# Altium PCB PCB1.pcbdoc (part 2 of 4)
Units mil, origin at the board's own origin, x right, y up, seen from the top; angles counter-clockwise.
Board outline 3067 x 4292.31 mil, 4 copper layers (Top Layer, Inner1, Inner2, Bottom Layer); 120 components, 131 nets, 693 pads, 342 vias.
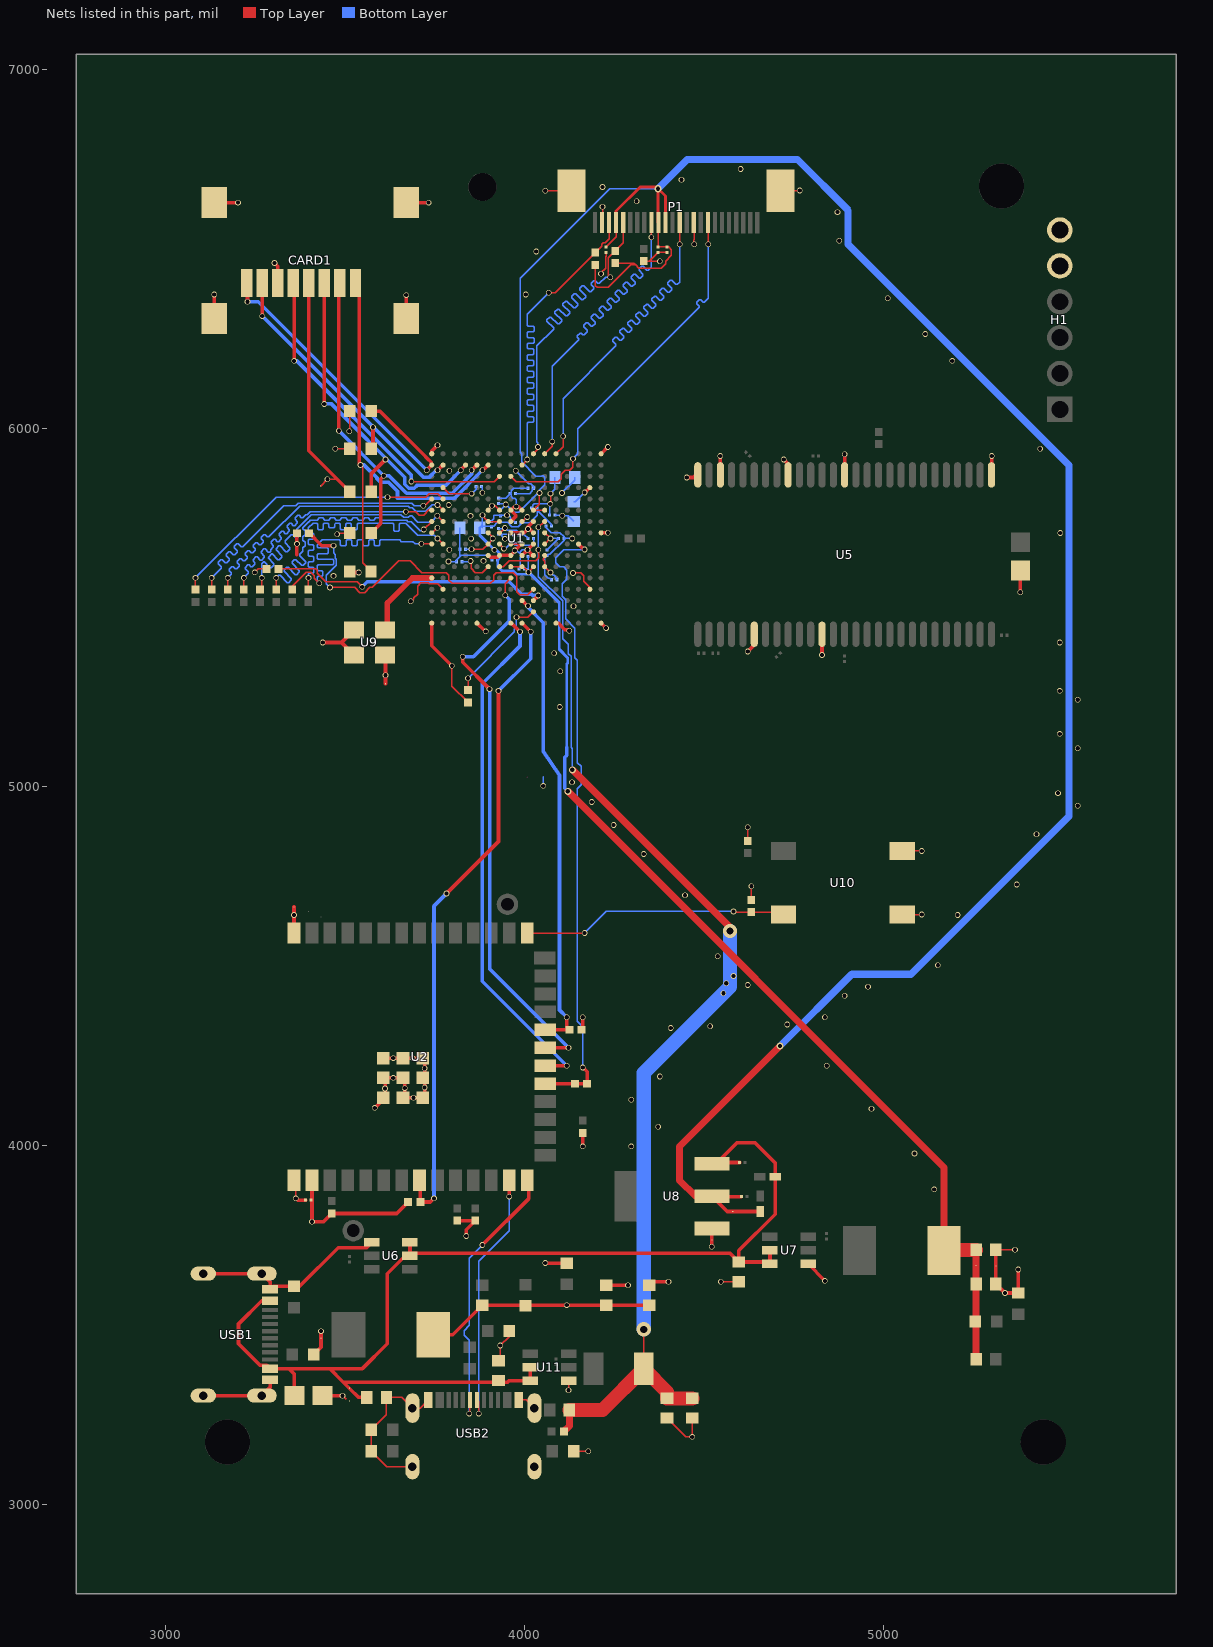
[diagram p4: the nets of this part, all layers, seen from the top]

## Via types
v1: diameter 15.75, hole 11.81, Top Layer to Bottom Layer, 336 vias
v2: diameter 19.68, hole 11.81, Top Layer to Bottom Layer, 4 vias
v3: diameter 39.37, hole 19.68, Top Layer to Bottom Layer, 2 vias

## Nets (pads, with @x,y where several pads share a name; then routed paths per layer and width w, separated by ;. In a path a pad name is that pad's centre, name@x,y a point inside that pad or via, vN(x,y) a via of type N, cw(c..) or ccw(c..) an arc to the next point about the centre after c; other vN are vias at no path point) (continued)
$2N5507: R23.2 U1.P10 | length 789
  Top Layer w3.94: R23.2@3314.36,5607.31 3417.32,5607.31 3421.49,5603.14 3421.49,5595.76 3445.76,5571.49 3533.14,5571.49 v1(3547.32,5557.31)
  Top Layer w10: U1.P10@4024.55,5519.09 4037.32,5531.85 v1@4037.32,5532.31
  Bottom Layer w10: v1(3547.32,5557.31) 3561.41,5571.41 3957.04,5571.41 3991.36,5537.1 4019.2,5537.1 4023.15,5533.15 v1@4038.15,5533.15
  other v1: 4038.15,5533.15
$2N5509: R24.2 U1.N10 | length 939.3
  Top Layer w3.94: v1(3457.32,5555.66) 3526.59,5555.66 3540.76,5541.49 3553.87,5541.49 3568.04,5555.66 3575.66,5555.66 3624.64,5604.64 3624.64,5604.85 3649.67,5629.87 3680.89,5629.87 3713.65,5597.11 3781,5597.11 3789.05,5589.07 3789.05,5575.85 3797.86,5567.04 3873.3,5567.04 3873.58,5567.31 3892.07,5567.31 3892.35,5567.04 3904.8,5567.04 3913.61,5575.85 3913.61,5589.96 3920.77,5597.11 3967.79,5597.11 3978.03,5586.88 3978.03,5544.36 3986.84,5535.55 4009.52,5535.55 U1.N10@4024.55,5550.59
  Top Layer w10: R24.2@3399.36,5707.31 3434.36,5672.31 v1(3467.32,5672.31)
  Bottom Layer w3.94: v1(3457.32,5555.66) 3447.32,5565.66 3447.32,5590.25 3475.19,5618.13 3475.19,5634.83 3472.32,5637.7 3472.32,5647.31 3467.32,5652.31 v1(3467.32,5672.31)
$2N5511: R25.2 U1.R10 | length 312.4
  Top Layer w3.94: R25.2@3842.32,5269.35 v1(3842.32,5302.31) ; v1(3977.32,5472.31) 4009.28,5472.31 U1.R10@4024.55,5487.6
  Bottom Layer w3.94: v1(3842.32,5302.31) 3971.49,5431.49 3971.49,5438.87 3977.32,5444.7 v1(3977.32,5472.31)
+1V1: C25.2 C27.2 C28.2 C41.1 C42.1 C43.1 C44.1 C49.1 C53.1 C54.1 C61.1 L2.2 pad.55@4112.31,5082.31 pad.55@5258.93,3665.01 R15.2 U1.G6 U1.G7 U1.L8 U1.L9 U1.L10 | length 3477.5
  Top Layer w3.94: v1@3882.32,5757.31 3882.32,5755.81 U1.G6@3898.57,5739.56 U1.G7@3930.07,5739.56 ; U1.L8@3961.57,5613.57 U1.L9@3993.07,5613.57 3995.68,5613.57 v1(4011.11,5598.14) 4024.55,5611.58 U1.L10@4024.55,5613.57
  Top Layer w19.68: v2(4120.58,4987.31) 5169.79,3938.11 L2.2@5169.79,3707.09 ; C25.2@5258.93,3403.85 C28.2@5258.93,3613.85 pad.55@5258.93,3665.01 C27.2@5258.93,3708.85
  Top Layer w39.37: L2.2@5169.79,3707.09 5171.55,3708.85 C27.2@5258.93,3708.85
  Bottom Layer w3.94: C61.1@3877.38,5724.81 3882.64,5730.08 v1(3882.64,5756.99) ; C61.1@3879.88,5722.31 3883.95,5726.4 3913.43,5726.4 3924.15,5737.12 3952.51,5737.12 3964.6,5725.03 3982.08,5725.03 3993.46,5736.49 4013.87,5736.49 4034.99,5757.61 4034.99,5767.31 ; C53.1@3999.99,5607.31 4007.32,5607.31 4009.99,5604.64 C49.1@4009.99,5642.31 ; C43.1@4034.99,5777.31 4034.99,5767.31 ; C44.1@4074.99,5727.31 4074.99,5731.67 4039.35,5767.31 4034.99,5767.31
  Bottom Layer w7.87: C61.1@3874.88,5722.31 3874.88,5701.32 v1(3915.79,5660.41) 3920.82,5660.41 3924.52,5656.71 3924.52,5656.56 3928.69,5652.39 3928.69,5636.01 C54.1@3924.99,5632.31 3924.99,5614.64 3937.32,5602.31 3967.14,5602.31 3977.14,5592.31 4010.58,5592.31 v1@4011.11,5592.85 ; v1(4011.11,5598.14) 4011.49,5598.14 4096.53,5513.1 4096.53,5405 4096.84,5404.69 4096.84,5389.94 4096.53,5389.63 4096.53,5383.27 4120.11,5359.69 4120.11,5344.94 4117.31,5342.15 4117.31,5110.63
  Bottom Layer w10: 4117.31,5110.63 4117.31,5087.31 pad.55@4112.31,5082.31 4112.31,4995.58 v2(4120.58,4987.31)
+1V8: C29.1 C32.2 C34.1 C35.1 C36.1 C62.1 C63.1 P1.4 P1.10 P1.11 pad.55@4580.36,3815.86 R38.2 R39.2 U1.F10 U1.F11 U8.2 | length 6822
  Top Layer w3.94: v1(4041.58,5818.9) 4041.58,5809.35 4041.02,5808.78 4041.02,5796.33 4041.58,5795.76 4041.58,5788.08 U1.F10@4024.55,5771.06 U1.F11@4056.05,5771.06 ; R38.2@4197.31,6455.27 4197.31,6437.03 4197.17,6436.88 4197.17,6397.46 4202.31,6392.31 4233.1,6392.31 4296.06,6455.27 4309.3,6455.27 ; C34.1@4227.31,6504.99 4255.17,6532.85 P1.4@4255.17,6572.88 ; R39.2@4252.31,6460.27 4304.3,6460.27 4309.3,6455.27 ; P1.10@4373.28,6572.88 4373.28,6505.96 C36.1@4372.31,6504.99 C35.1@4397.31,6504.99 4401.67,6504.99 4409.6,6497.06 4409.6,6482.21 4393.14,6465.75 4393.14,6458.72 4380.61,6446.19 4318.39,6446.19 4309.3,6455.27
  Top Layer w7.87: P1.4@4255.17,6572.88 4255.17,6604.87 4322.61,6672.31 4367.31,6672.31 v2(4372.31,6667.31) ; P1.10@4373.28,6572.88 4372.31,6573.84 v2(4372.31,6667.31) ; P1.11@4392.96,6572.88 4392.96,6646.67 v2(4372.31,6667.31)
  Top Layer w10: C29.1@4604.64,3857.32 4523.21,3857.32 4564.67,3815.86 pad.55@4580.36,3815.86 C32.2@4657.31,3815.86
  Top Layer w19.68: U8.2@4522.07,3858.45 4476.18,3858.45 4432.31,3902.32 4432.31,3997.32 v2(4712.31,4277.31)
  Bottom Layer w3.94: C63.1@3927.32,5789.64 3944.86,5789.64 v1(3947.69,5786.81) ; C62.1@3932.32,5769.99 3932.32,5771.43 v1(3947.69,5786.81) ; v2(4372.31,6667.31) 4237.31,6667.31 3987.32,6417.31 3987.32,5932.31 3991.49,5928.14 3991.49,5905.76 4031.35,5865.9 4048.32,5865.9 4049.74,5867.31 4052.32,5867.31 4056.84,5862.79 4056.84,5842.06 4041.58,5826.81 v1(4041.58,5818.9) 4037.17,5818.9 3983.5,5765.23 3970.39,5765.23 3948.81,5786.81 v1(3947.69,5786.81)
  Bottom Layer w19.68: v2(4372.31,6667.31) 4453.41,6748.41 4761.22,6748.41 4902.31,6607.31 4902.31,6512.31 5517.31,5897.31 5517.31,4917.31 5077.31,4477.31 4912.31,4477.31 v2(4712.31,4277.31)
+2V5: C65.2 C67.2 C68.2 L3.2 R41.2 U1.G11 U1.L7 | length 3334.5
  Top Layer w3.94: U1.L7@3930.07,5613.57 3940.3,5613.57 3956.76,5630.04 4030.78,5630.04 4039.59,5638.85 4039.59,5651.3 4038.43,5652.47 v1(4038.43,5660.82) ; v1(4038.43,5723.81) 4054.18,5739.56 U1.G11@4056.05,5739.56 ; L3.2@4332.2,3377.32 v3(4332.2,3487.32)
  Top Layer w19.68: R41.2@4109.35,3202.32 4124.88,3217.84 C65.2@4124.88,3262.32 ; v2(4133.14,5047.31) 4572.31,4608.14 v3(4572.31,4597.31)
  Top Layer w39.37: C65.2@4124.88,3262.32 4217.2,3262.32 L3.2@4332.2,3377.32 4397.31,3312.2 C68.2@4397.31,3294.88 C67.2@4467.31,3294.88
  Bottom Layer w3.94: v1(4038.43,5723.81) v1(4038.43,5660.82) 4038.43,5586.2 4106.37,5518.26 4106.37,5413.26 4122.31,5397.31 4122.31,5371.4 4129.95,5363.76 4129.95,5109.68 4133.14,5106.49 v2(4133.14,5047.31)
  Bottom Layer w39.37: v3(4332.2,3487.32) 4332.2,4202.2 v1(4554.27,4424.27) 4572.31,4442.31 v3(4572.31,4597.31)
  other v1: 4562.31,4452.31 4582.31,4472.31
+3V3: C8.2 C17.2 C19.2 C22.2 C23.2 C37.1 C39.1 C40.1 C45.1 C46.1 C47.1 C48.1 C50.1 C51.1 C52.1 C55.1 C56.1 C57.1 C58.1 C59.1 CARD1.4 H1.5 L1.2 pad.55@3431.11,5838.15 R3.1 R4.1 R5.2 R7.2 R11.2 R16.2 R17.2 R18.2 R19.2 R20.2 R21.2 R22.2 R23.1 U1.F6 U1.F7 U1.G9 U1.H6 U1.H7 U1.H11 U1.J6 U1.J7 U1.J11 U1.K11 U1.L6 U1.L11 U2.2 U9.1 U9.4 | length 3220.1
  Top Layer w3.94: v1(3247.39,5597.74) 3256.97,5607.31 R23.1@3280.28,5607.31 ; pad.55@3431.11,5838.15 v1(3450.28,5857.31) 3477.5,5857.31 3477.58,5857.39 ; v1(3472.32,5942.31) R18.2@3512.66,5942.31 ; v1(3477.32,5703.97) 3480.66,5707.31 R17.2@3512.66,5707.31 ; v1@3512.66,5992.31 R19.2@3512.66,6047.31 ; v1(3849.46,5629.32) 3850.62,5628.16 3850.62,5608.76 3862.07,5597.31 3882.32,5597.31 U1.L6@3898.57,5613.57 ; v1@3852.32,5662.31 3860.06,5662.31 3860.85,5661.53 3883.54,5661.53 U1.J6@3898.57,5676.56 3911.49,5689.48 v1(3911.49,5692.29) 3911.49,5695.15 U1.H6@3898.57,5708.06 ; U1.F6@3898.57,5771.06 3909.13,5781.61 v1(3909.13,5783.56) 3917.57,5783.56 U1.F7@3930.07,5771.06 ; U1.J7@3930.07,5676.56 3942.32,5664.32 v1@3942.32,5662.31 ; U1.H7@3930.07,5708.06 3931.94,5708.06 v1(3945.17,5721.29) ; U1.G9@3993.07,5739.56 4005.82,5752.31 v1(4007.32,5752.31) ; U1.K11@4056.05,5645.07 4056.05,5640.07 4052.32,5636.34 4052.32,5632.31 4056.05,5628.57 U1.L11@4056.05,5613.57 v1(4072.32,5597.31) ; U1.J11@4056.05,5676.56 4071.8,5692.31 v1(4072.32,5692.31) 4056.57,5708.06 U1.H11@4056.05,5708.06
  Top Layer w10: CARD1.4@3398.38,6404.32 3398.38,5936.59 3477.58,5857.39 R20.2@3512.66,5822.31 ; U2.2@3412.12,3902.82 3407.32,3898.02 v1(3407.32,3787.32) 3439.36,3787.32 R7.2@3462.32,3810.28 3643.24,3810.28 R5.2@3675.28,3842.32 ; v1(3437.32,5402.31) 3489.55,5402.31 ; R16.2@3512.5,5600.29 3515.47,5597.31 v1(3537.32,5597.31) ; U9.1@3524.01,5367.86 3489.55,5402.31 ; U9.4@3524.01,5436.77 3489.55,5402.31 ; L1.2@3745.43,3472.32 3799.88,3472.32 C19.2@3882.32,3554.76 4000.22,3554.76 R11.2@4002.32,3552.66 4004.41,3554.76 v1(4117.88,3554.76) C23.2@4227.31,3554.76 C22.2@4347.31,3554.76 ; R21.2@3812.32,3790.28 R22.2@3862.32,3790.28 3837.32,3765.28 v1(3837.32,3747.32) ; R3.1@4159.35,4322.31 4162.31,4325.27 v1(4162.31,4357.31) ; v1(4162.31,3997.32) R4.1@4162.31,4035.28 ; v1(5382.31,5542.31) C8.2@5382.31,5602.94
  Bottom Layer w3.94: C51.1@3824.99,5627.31 3847.45,5627.31 v1(3849.46,5629.32) ; C56.1@3834.99,5662.31 3851.7,5662.31 v1(3852.01,5662.01) ; C37.1@3879.99,5837.31 3882.32,5834.99 v1(3882.32,5819.66) ; C45.1@3927.32,5719.99 3943.87,5719.99 v1(3945.17,5721.29) 3951.87,5714.6 3977.06,5714.6 3981.72,5709.94 3981.72,5705.59 C46.1@3984.99,5702.31 3999.64,5702.31 C47.1@4009.64,5692.31 ; v1(3942.32,5663.93) 3946.25,5663.93 C57.1@3959.64,5677.31 ; C50.1@3974.99,5817.31 4014.35,5817.31 4021.72,5824.69 4021.72,5829.04 C39.1@4024.99,5832.31 4024.99,5836.67 4017.06,5844.6 4012.13,5844.6 v1(3975.44,5881.29) ; C52.1@4062.32,5659.99 C55.1@4094.64,5692.31 v1(4072.32,5692.31) ; v1(4072.32,5597.31) 4080.03,5589.6 4082.06,5589.6 4089.99,5581.67 C48.1@4089.99,5577.31 ; C40.1@4084.99,5757.31 4103.16,5757.31 v1(4105.12,5755.36) 4121.71,5755.36 C59.1@4137.31,5739.76 ; v1(4104.26,5819.21) 4139.88,5854.82 C58.1@4139.88,5862.31
  other v1: 3467.32,5587.87 3511.34,5991
+5V: C20.2 C26.2 C30.1 C31.2 C33.2 C66.2 pad.55@3511.57,3323.06 U6.2 U6.3 U7.2 U7.3 U8.3 U11.2 U11.3 USB1.A4B9 USB1.B4A9 | length 3397.5
  Top Layer w10: USB1.A4B9@3290.32,3566.8 3266.8,3566.8 3202.32,3502.32 3202.32,3447.35 3263.14,3386.53 3281.62,3386.53 USB1.B4A9@3290.32,3377.82 3342.68,3377.82 ; C33.2@3357.95,3302.32 3357.95,3362.56 3342.68,3377.82 ; C20.2@3559.76,3297.32 3537.32,3297.32 pad.55@3511.57,3323.06 3494.76,3339.88 ; U6.3@3680.47,3729.72 U6.2@3680.47,3692.32 ; U11.2@4016.25,3381.21 U11.3@4016.25,3343.81 3956.25,3343.81 3952.32,3339.88 3494.76,3339.88 ; U8.3@4522.07,3949 4534,3949 U8.3@4537.31,3952.32 ; C30.1@4599.64,3952.32 U8.3@4537.31,3952.32 ; U7.2@4684.16,3707.32 U7.3@4684.16,3669.91 4679.2,3674.88 C26.2@4597.31,3674.88 ; 3342.68,3377.82 3456.8,3377.82 ; 3456.8,3377.82 3547.82,3377.82 3617.32,3447.32 3617.32,3642.32 3667.32,3692.32 U6.2@3680.47,3692.32 ; 3456.8,3377.82 3494.76,3339.88 ; U6.2@3680.47,3692.32 3686.98,3698.83 4573.36,3698.83 C26.2@4597.31,3674.88 ; U8.3@4537.31,3952.32 4592.31,4007.32 4642.31,4007.32 4698.77,3950.86 C31.2@4698.77,3912.32 4698.77,3808.32 4597.31,3706.86 C26.2@4597.31,3674.88
CCLK: R6.1 R6.2 U1.J14 U2.19 | length 1754.5
  Top Layer w10: U2.19@4062.51,4172.31 R6.1@4140.27,4172.31 R6.2@4174.35,4172.31 4174.35,4205.27 v1(4162.31,4217.31) ; U1.J14@4150.55,5676.56 4165.62,5661.49 v1(4167.31,5661.49)
  Bottom Layer w3.94: v1(4162.31,4217.31) 4162.31,4330.65 4146.49,4346.47 4146.49,4994.99 4157.31,5005.81 4157.31,5057.31 4147.31,5067.31 4146.49,5067.31 4146.49,5353.14 4140.5,5359.13 4140.5,5441.87 4114.58,5467.8 4114.58,5521.53 4105.58,5530.53 4105.58,5565.58 4118.14,5578.14 4118.14,5603.87 4108.87,5613.14 4097.62,5613.14 4086.42,5624.34 4086.42,5638.81 4109.11,5661.49 v1(4167.31,5661.49)
CRYSTAL: U1.M1 U9.3 | length 231
  Top Layer w15.75: U9.3@3610.62,5436.77 3617.32,5443.45 3617.32,5512.31 3687.07,5582.07 U1.M1@3741.09,5582.07
D0: R26.1 U1.E2 | length 827.3
  Top Layer w3.94: R26.1@3082.32,5549.35 v1(3082.32,5582.31) ; v1@3617.32,5807.31 3724.59,5807.31 3734.87,5817.59 3757.56,5817.59 U1.E2@3772.59,5802.56
  Bottom Layer w3.94: v1(3082.32,5582.31) 3307.32,5807.31 v1(3617.69,5807.31)
D1: R27.1 U1.E1 | length 830.3
  Top Layer w3.94: R27.1@3127.32,5549.35 v1(3127.32,5582.31) ; v1(3717.32,5783.46) 3722,5783.46 U1.E1@3741.09,5802.56
  Bottom Layer w3.94: v1(3127.32,5582.31) 3154.28,5609.28 3154.28,5613.22 3145.72,5621.78 3145.72,5625.72 3152.92,5632.92 3156.86,5632.92 3165.42,5624.36 3169.36,5624.36 3176.56,5631.56 3176.56,5635.49 3167.99,5644.06 3167.99,5647.99 3175.19,5655.19 3179.13,5655.19 3187.69,5646.63 3191.63,5646.63 3198.83,5653.83 3198.83,5657.76 3190.26,5666.33 3190.26,5670.26 3197.46,5677.46 3201.4,5677.46 3209.96,5668.9 3213.9,5668.9 3328.46,5783.46 3362.32,5783.46 3369.33,5790.46 3685.54,5790.46 3692.55,5783.46 v1(3717.32,5783.46)
D2: R28.1 U1.F2 | length 844.7
  Top Layer w3.94: R28.1@3172.32,5549.35 v1(3172.32,5582.31) ; v1(3757.19,5785.61) 3758.04,5785.61 U1.F2@3772.59,5771.06
  Bottom Layer w3.94: v1(3172.32,5582.31) 3182.32,5592.31 3182.32,5596.25 3176.25,5602.31 3176.25,5606.25 3183.45,5613.45 3187.39,5613.45 3193.45,5607.39 3197.39,5607.39 3204.59,5614.59 3204.59,5618.52 3198.52,5624.59 3198.52,5628.52 3205.72,5635.72 3209.66,5635.72 3215.72,5629.66 3219.66,5629.66 3226.86,5636.86 3226.86,5640.79 3220.79,5646.86 3220.79,5650.79 3227.99,5657.99 3231.93,5657.99 3237.99,5651.93 3241.93,5651.93 3249.13,5659.13 3249.13,5663.07 3243.07,5669.13 3243.07,5673.07 3250.26,5680.26 3254.2,5680.26 3260.26,5674.2 3264.2,5674.2 3271.4,5681.4 3271.4,5685.34 3265.34,5691.4 3265.34,5695.34 3272.53,5702.53 3276.47,5702.53 3282.53,5696.47 3286.47,5696.47 3372.59,5782.59 3675.64,5782.59 3679.95,5778.28 3686.59,5778.28 3697.24,5767.63 3723.87,5767.63 3741.85,5785.61 v1(3757.19,5785.61)
D3: R29.1 U1.F1 | length 814.7
  Top Layer w3.94: R29.1@3217.32,5549.35 v1(3217.32,5582.31) ; v1(3669.08,5766.76) 3696.63,5766.76 3705.76,5757.63 3718.87,5757.63 3732.97,5771.72 3740.43,5771.72 U1.F1@3741.09,5771.06
  Bottom Layer w3.94: v1(3217.32,5582.31) 3229.89,5594.89 3229.89,5598.82 3221.32,5607.39 3221.32,5611.32 3228.52,5618.52 3232.46,5618.52 3237.16,5613.82 3241.09,5613.82 3248.29,5621.02 3248.29,5624.96 3243.59,5629.66 3243.59,5633.59 3250.79,5640.79 3254.73,5640.79 3263.29,5632.23 3267.23,5632.23 3274.43,5639.43 3274.43,5643.36 3265.86,5651.93 3265.86,5655.86 3273.06,5663.06 3277,5663.06 3285.56,5654.5 3289.5,5654.5 3291.57,5656.57 3291.57,5660.36 3299.92,5668.71 3299.92,5672.65 3293.25,5679.32 3293.25,5683.25 3300.45,5690.45 3304.39,5690.45 3311.05,5683.79 3314.99,5683.79 3322.19,5690.98 3322.19,5694.92 3315.52,5701.59 3315.52,5705.52 3322.72,5712.72 3326.66,5712.72 3333.33,5706.06 3337.26,5706.06 3344.46,5713.25 3344.46,5717.19 3337.79,5723.86 3337.79,5727.79 3344.99,5734.99 3348.93,5734.99 3355.6,5728.33 3359.53,5728.33 3366.73,5735.53 3366.73,5739.46 3360.07,5746.13 3360.07,5750.07 3367.26,5757.26 3371.2,5757.26 3377.87,5750.6 3381.8,5750.6 3390.02,5758.81 3393.81,5758.81 3401.76,5766.76 v1(3669.08,5766.76)
D4: R30.1 U1.G2 | length 836.9
  Top Layer w3.94: R30.1@3262.32,5549.35 3267.32,5554.35 v1(3267.32,5582.31) ; v1(3756.6,5755.44) 3756.71,5755.44 U1.G2@3772.59,5739.56
  Bottom Layer w3.94: v1(3267.32,5582.31) 3267.32,5621.18 3273.07,5626.94 3273.78,5626.94 3290,5610.72 3293.94,5610.72 3301.13,5617.92 3301.13,5621.86 3284.92,5638.07 3284.92,5638.78 3295.34,5649.21 3296.05,5649.21 3312.27,5632.99 3316.21,5632.99 3323.4,5640.19 3323.4,5644.13 3307.19,5660.34 3307.19,5664.28 3314.39,5671.48 3318.32,5671.48 3334.54,5655.26 3338.48,5655.26 3345.68,5662.46 3345.68,5666.4 3332.32,5679.76 3332.32,5686.18 3349.07,5702.94 3353.01,5702.94 3361.6,5694.34 3365.54,5694.34 3372.74,5701.54 3372.74,5705.48 3364.15,5714.07 3364.15,5718.01 3405.03,5758.89 3654.57,5758.89 3662.53,5750.94 3675.64,5750.94 3680.64,5755.94 3684.91,5755.94 3702.7,5738.14 3739.3,5738.14 v1(3756.6,5755.44)
D5: R31.1 U1.G1 | length 826
  Top Layer w3.94: R31.1@3307.32,5549.35 v1(3307.32,5582.31) ; v1(3718.64,5717.31) 3718.86,5717.31 U1.G1@3741.09,5739.56
  Bottom Layer w3.94: v1(3307.32,5582.31) 3314.35,5589.35 3318.29,5589.35 3338.33,5569.31 3342.27,5569.31 3349.47,5576.51 3349.47,5580.45 3329.43,5600.49 3329.43,5604.43 3336.62,5611.62 3340.56,5611.62 3360.6,5591.58 3364.54,5591.58 3371.74,5598.78 3371.74,5602.72 3351.7,5622.76 3351.7,5626.7 3358.14,5633.14 3362.07,5633.14 3378.31,5616.91 3382.24,5616.91 3389.44,5624.11 3389.44,5628.04 3373.21,5644.27 3373.21,5648.21 3381.1,5656.1 3381.1,5666.24 3383.89,5669.03 3385.5,5669.03 3388.29,5671.81 3388.29,5681.99 3385.5,5684.77 3383.89,5684.77 3381.1,5687.56 3381.1,5697.74 3383.89,5700.52 3385.5,5700.52 3388.29,5703.31 3388.29,5713.49 3385.5,5716.27 3383.89,5716.27 3381.1,5719.05 3381.1,5721.95 3398.67,5739.51 3399.51,5739.51 3403.06,5743.06 3422.17,5743.06 3424.96,5745.85 3424.96,5747.08 3427.74,5749.86 3437.92,5749.86 3440.71,5747.08 3440.71,5745.85 3443.49,5743.06 3453.67,5743.06 3456.45,5745.85 3456.45,5747.08 3459.24,5749.86 3469.42,5749.86 3472.2,5747.08 3472.2,5745.85 3474.99,5743.06 3485.17,5743.06 3487.95,5745.85 3487.95,5747.08 3490.73,5749.86 3500.91,5749.86 3503.7,5747.08 3503.7,5745.85 3506.48,5743.06 3516.66,5743.06 3519.45,5745.85 3519.45,5747.08 3522.23,5749.86 3532.41,5749.86 3535.19,5747.08 3535.19,5745.85 3537.98,5743.06 3548.16,5743.06 3550.94,5745.85 3550.94,5747.08 3553.73,5749.86 3563.91,5749.86 3566.69,5747.08 3566.69,5745.85 3569.47,5743.06 3579.65,5743.06 3582.44,5745.85 3582.44,5747.08 3585.22,5749.86 3595.4,5749.86 3598.19,5747.08 3598.19,5745.85 3600.97,5743.06 3671.23,5743.06 3674.78,5739.51 3683.77,5739.51 3709.52,5713.77 3715.09,5713.77 v1(3718.64,5717.31)
D6: R32.1 U1.J1 | length 823.8
  Top Layer w3.94: R32.1@3352.32,5549.35 3352.32,5559.7 3390.76,5598.14 3403.87,5598.14 3413.14,5588.87 3413.14,5581.49 v1(3427.32,5567.31) ; v1(3712.32,5677.31) 3740.34,5677.31 U1.J1@3741.09,5676.56
  Bottom Layer w3.94: v1(3427.32,5567.31) 3421.49,5573.14 3421.49,5584.32 3424.27,5587.11 3434.68,5587.11 3437.46,5589.89 3437.46,5600.07 3434.68,5602.86 3424.27,5602.86 3421.49,5605.64 3421.49,5615.82 3424.27,5618.6 3464.53,5618.6 3467.32,5621.39 3467.32,5631.57 3464.53,5634.35 3424.27,5634.35 3421.49,5637.14 3421.49,5647.32 3424.27,5650.1 3449.52,5650.1 3452.3,5652.88 3452.3,5663.06 3449.52,5665.85 3424.27,5665.85 3421.49,5668.63 3421.49,5673.87 3435.76,5688.14 3483.69,5688.14 3486.47,5685.36 3486.47,5675.1 3489.26,5672.31 3499.44,5672.31 3502.22,5675.1 3502.22,5685.36 3505.01,5688.14 3515.19,5688.14 3517.97,5685.36 3517.97,5675.1 3520.75,5672.31 3530.93,5672.31 3533.72,5675.1 3533.72,5685.36 3536.5,5688.14 3546.68,5688.14 3549.47,5685.36 3549.47,5675.1 3552.25,5672.31 3562.43,5672.31 3565.21,5675.1 3565.21,5685.36 3568,5688.14 3578.18,5688.14 3580.96,5685.36 3580.96,5675.1 3583.75,5672.31 3593.93,5672.31 3596.71,5675.1 3596.71,5685.36 3599.49,5688.14 3651.49,5688.14 3656.49,5683.14 3688.87,5683.14 3694.7,5677.31 v1(3712.32,5677.31)
D7: R34.1 U1.J2 | length 826.3
  Top Layer w3.94: R34.1@3397.32,5549.35 v1(3397.32,5582.31) ; v1(3757.32,5692.31) 3757.32,5691.85 U1.J2@3772.59,5676.56
  Bottom Layer w3.94: v1(3397.32,5582.31) 3397.32,5593.11 3400.1,5595.9 3409.68,5595.9 3412.46,5598.68 3412.46,5608.86 3409.68,5611.64 3400.1,5611.64 3397.32,5614.43 3397.32,5624.61 3400.1,5627.39 3409.68,5627.39 3412.46,5630.18 3412.46,5640.36 3409.68,5643.14 3400.1,5643.14 3397.32,5645.92 3397.32,5656.1 3400.1,5658.89 3409.68,5658.89 3412.46,5661.67 3412.46,5671.85 3409.68,5674.64 3400.1,5674.64 3397.32,5677.42 3397.32,5687.6 3400.1,5690.38 3409.68,5690.38 3412.46,5693.17 3412.46,5703.35 3409.68,5706.13 3400.1,5706.13 3397.32,5708.92 3397.32,5722.31 3410.19,5735.19 3419.98,5735.19 3422.76,5732.41 3422.76,5719.09 3425.54,5716.3 3435.72,5716.3 3438.51,5719.09 3438.51,5732.41 3441.29,5735.19 3451.47,5735.19 3454.26,5732.41 3454.26,5724.65 3457.04,5721.87 3467.22,5721.87 3470,5724.65 3470,5732.41 3472.79,5735.19 3482.97,5735.19 3485.75,5732.41 3485.75,5719.09 3488.54,5716.3 3498.72,5716.3 3501.5,5719.09 3501.5,5732.41 3504.28,5735.19 3514.47,5735.19 3517.25,5732.41 3517.25,5719.09 3520.03,5716.3 3530.21,5716.3 3533,5719.09 3533,5732.41 3535.78,5735.19 3632.38,5735.19 3635.16,5732.41 3635.16,5715.1 3637.95,5712.31 3648.13,5712.31 3650.91,5715.1 3650.91,5732.41 3653.69,5735.19 3667.97,5735.19 3701.67,5701.49 3748.14,5701.49 v1(3757.32,5692.31)
DIN: U1.T8 U2.20 | length 1441.2
  Top Layer w10: U1.T8@3961.57,5456.1 3963.53,5456.1 v1(3987.32,5432.31) ; U2.20@4062.51,4222.31 v1(4117.31,4222.31)
  Bottom Layer w10: v1(3987.32,5432.31) 3987.32,5392.31 3882.32,5287.31 3882.32,4457.31 v1(4117.31,4222.31)
DN: U2.13 USB2.A7 | length 727.9
  Top Layer w3.94: USB2.A7@3867.16,3290.32 3872.32,3285.16 v1(3872.32,3252.32)
  Top Layer w10: v1(3957.32,3857.32) 3957.32,3898.02 U2.13@3962.12,3902.82
  Bottom Layer w3.94: v1(3872.32,3252.32) 3872.32,3677.32 3957.32,3762.32 v1(3957.32,3857.32)
DONE: pad.55@4077.32,5057.31 R3.2 U1.P9 U2.22 | length 1310.8
  Top Layer w10: U1.P9@3993.07,5519.09 4007.64,5504.51 v1(4009.51,5504.51) ; U2.22@4062.51,4322.31 R3.2@4125.27,4322.31 4117.31,4330.27 v1(4117.31,4357.31)
  Bottom Layer w10: v1(4009.51,5504.51) 4009.51,5500.12 4052.32,5457.31 4052.32,5097.31 4097.31,5032.31 4097.31,4377.31 v1(4117.31,4357.31)
DOUT: U1.M8 U2.21 | length 1574.2
  Top Layer w3.94: v1(3945.82,5534.26) 3945.82,5566.33 U1.M8@3961.57,5582.07
  Top Layer w10: v1(3827.32,5362.31) 3827.32,5347.31 v1(3902.32,5272.31) ; U2.21@4062.51,4272.31 v1(4122.31,4272.31)
  Bottom Layer w10: v1(3827.32,5362.31) 3857.32,5362.31 3957.01,5462.01 3957.01,5523.07 v1(3945.82,5534.26) ; v1(3902.32,5272.31) 3902.32,4492.31 v1(4122.31,4272.31)
DP: U2.14 USB2.A6 | length 769.2
  Top Layer w3.94: v1@3847.47,3252.32 USB2.A6@3847.47,3290.32
  Top Layer w10: v1(3882.32,3722.32) 4012.12,3852.12 U2.14@4012.12,3902.82
  Bottom Layer w3.94: v1(3845.58,3252.32) 3845.58,3456.66 3831.49,3470.76 3831.49,3483.87 3845.58,3497.97 3845.58,3685.58 v1(3882.32,3722.32)
FSCL: P1.5 R39.1 U1.A10 | length 1063.4
  Top Layer w3.94: U1.A10@4024.55,5928.53 4037.32,5941.3 v1(4037.32,5947.31) ; v1(4239.02,6420.61) 4233.73,6425.9 4233.73,6474.7 4252.31,6493.29 R39.1@4252.31,6494.35 4274.85,6516.89 P1.5@4274.85,6572.88
  Bottom Layer w3.94: v1(4037.32,5947.31) 4037.32,5958.56 4034.14,5961.74 4034.14,6229.09 4080.96,6275.9 4080.96,6279.84 4062.37,6298.43 4062.37,6302.37 4069.57,6309.57 4073.5,6309.57 4092.09,6290.98 4096.03,6290.98 4103.23,6298.18 4103.23,6302.11 4084.64,6320.7 4084.64,6324.64 4091.84,6331.84 4095.77,6331.84 4114.36,6313.25 4118.3,6313.25 4125.5,6320.45 4125.5,6324.38 4106.91,6342.97 4106.91,6346.91 4114.11,6354.11 4118.04,6354.11 4136.63,6335.52 4140.57,6335.52 4147.77,6342.72 4147.77,6346.65 4131.15,6363.27 4131.15,6367.21 4138.35,6374.41 4142.28,6374.41 4158.9,6357.79 4162.84,6357.79 4170.04,6364.99 4170.04,6368.93 4153.42,6385.55 4153.42,6389.48 4160.62,6396.68 4164.56,6396.68 4181.18,6380.06 4185.11,6380.06 4193.21,6388.16 4193.21,6392.1 4185.73,6399.57 4185.73,6403.51 4192.93,6410.71 4196.87,6410.71 4204.35,6403.23 4208.28,6403.23 4225.67,6420.61 v1(4239.02,6420.61)
FSDA: P1.3 R38.1 U1.B9 | length 1063.6
  Top Layer w3.94: U1.B9@3993.07,5897.03 4007.32,5911.28 v1(4007.32,5912.31) ; v1(4067.32,6377.31) 4085.28,6377.31 R38.1@4197.31,6489.35 4215.03,6507.07 4215.03,6512.42 4219.69,6517.08 4225.04,6517.08 4235.48,6527.52 P1.3@4235.48,6572.88
  Bottom Layer w3.94: v1(4007.32,5912.31) 4007.32,6012.88 4010.1,6015.67 4022.56,6015.67 4025.35,6018.45 4025.35,6028.63 4022.56,6031.41 4010.1,6031.41 4007.32,6034.2 4007.32,6044.79 4010.1,6047.57 4022.56,6047.57 4025.35,6050.36 4025.35,6060.54 4022.56,6063.32 4010.1,6063.32 4007.32,6066.11 4007.32,6076.29 4010.1,6079.07 4022.56,6079.07 4025.35,6081.85 4025.35,6092.03 4022.56,6094.82 4010.1,6094.82 4007.32,6097.6 4007.32,6107.78 4010.1,6110.57 4022.56,6110.57 4025.35,6113.35 4025.35,6123.53 4022.56,6126.31 4010.1,6126.31 4007.32,6129.1 4007.32,6139.28 4010.1,6142.06 4022.56,6142.06 4025.35,6144.85 4025.35,6155.03 4022.56,6157.81 4010.1,6157.81 4007.32,6160.59 4007.32,6170.78 4010.1,6173.56 4022.56,6173.56 4025.35,6176.34 4025.35,6186.52 4022.56,6189.31 4010.1,6189.31 4007.32,6192.09 4007.32,6202.27 4010.1,6205.06 4022.56,6205.06 4025.35,6207.84 4025.35,6218.02 4022.56,6220.8 4010.1,6220.8 4007.32,6223.59 4007.32,6233.77 4010.1,6236.55 4024.53,6236.55 4027.32,6239.34 4027.32,6249.52 4024.53,6252.3 4010.1,6252.3 4007.32,6255.08 4007.32,6265.26 4010.1,6268.05 4024.53,6268.05 4027.32,6270.83 4027.32,6281.01 4024.53,6283.8 4010.1,6283.8 4007.32,6286.58 4007.32,6317.31 v1(4067.32,6377.31)
GND: C17.1 C20.1 C22.1 C23.1 C26.1 C27.1 C28.1 C33.1 C34.2 C35.2 C36.2 C37.2 C39.2 C40.2 C41.2 C42.2 C43.2 C44.2 C45.2 C46.2 C47.2 C48.2 C49.2 C50.2 C51.2 C52.2 C53.2 C54.2 C55.2 C56.2 C57.2 C58.2 C59.2 C61.2 C62.2 C63.2 C66.1 C67.1 C68.1 CARD1.6 CARD1.9 CARD1.10 CARD1.11 CARD1.12 H1.6 P1.2 P1.15 P1.25 P1.26 pad.55@3357.12,4665 pad.55@3432.32,3462.32 pad.55@3512.32,3287.32 pad.55@3612.32,5287.31 pad.55@4052.32,5027.32 pad.55@4522.07,3735.92 pad.55@5314.05,3663.47 R9.1 R10.1 R12.1 R14.1 R24.1 R25.1 R35.2 R36.2 R37.2 R40.1 R42.2 R43.2 R45.1 U1.A1 U1.A16 U1.D2 U1.D15 U1.F8 U1.F9 U1.G8 U1.G10 U1.H1 U1.H8 U1.H9 U1.H10 U1.H16 U1.J8 U1.J9 U1.J10 U1.K6 U1.K7 U1.K8 U1.K9 U1.K10 U1.N2 U1.N15 U1.T1 U1.T5 U1.T12 U1.T16 U2.1 U2.40 U2.41 U5.6 U5.12 U5.28 U5.41 U5.46 U5.52 U5.54 U6.4 U7.4 U8.1 U9.2 U10.2 U10.4 U11.4 USB1.1 USB1.2 USB1.3 USB1.4 USB1.A1B12 USB1.B1A12 USB2.1 USB2.2 USB2.3 USB2.4 USB2.A1B12 USB2.B1A12 | length 6775.4
  Top Layer w3.94: U2.1@3357.12,3902.82 3362.12,3897.82 v1(3362.12,3852.32) ; v1(3492.32,3302.32) 3502.32,3292.32 ; v1(3682.32,5517.31) 3685.22,5517.31 3691.49,5523.59 3691.49,5526.9 3701.49,5536.9 3701.49,5558.87 3710.76,5568.14 3731.49,5568.14 3733.76,5565.86 3757.32,5565.86 U1.N2@3772.59,5550.59 ; USB2.3@3687.24,3104.3 3615.66,3104.3 R42.2@3572.66,3147.32 R43.2@3572.66,3207.32 3614.88,3249.53 C20.1@3614.88,3297.32 3657.61,3297.32 USB2.1@3687.24,3267.68 3708.68,3267.68 USB2.A1B12@3731.32,3290.32 ; 3747.32,5712.31 3756.84,5721.84 v1(3756.84,5722.31) ; U1.D2@3772.59,5834.05 3789.32,5817.31 3797.58,5817.31 3797.86,5817.59 3841.81,5817.59 3842.09,5817.31 v1@3852.32,5817.31 ; v1(3797.32,5337.31) 3797.32,5280.27 R25.1@3842.32,5235.27 ; C66.1@3927.32,3399.88 3932.32,3404.88 v1(3932.32,3442.32) 3956.97,3466.97 R45.1@3956.97,3482.32 ; U1.J8@3961.57,5676.56 U1.J9@3990.82,5676.56 ; USB2.B1A12@3983.3,3290.32 4004.76,3290.32 USB2.2@4027.39,3267.68 ; v1(4057.32,6661.62) P1.26@4130.94,6661.62 ; v1(4071.8,5788.68) 4072.32,5789.19 v1(4072.32,5817.31) ; v1(4122.31,3317.32) 4122.55,3317.55 U11.4@4122.55,3343.81 ; v1(4134.8,5595.95) 4140.27,5595.95 4141.44,5597.11 4156.77,5597.11 4165.58,5588.3 4165.58,5572.97 4182.03,5556.52 U1.N15@4182.03,5550.59 ; R40.1@4136.98,3147.32 v1(4177.31,3147.32) ; v1(4213,6430.33) 4213,6433 4225.86,6445.86 4225.86,6477.97 4227.31,6479.42 C34.2@4227.31,6489.64 ; P1.2@4215.8,6572.88 4217.31,6574.39 v1(4217.31,6617.31) ; R35.2@4332.31,6465.27 4347.95,6465.27 ; v1(4377.31,6465.27) 4347.95,6465.27 ; C68.1@4397.31,3239.76 4449.76,3187.32 v1(4467.31,3187.32) C67.1@4467.31,3239.76 ; C35.2@4397.31,6489.64 C36.2@4372.31,6489.64 4347.95,6465.27 ; P1.15@4471.55,6572.82 4473,6571.38 4473,6525.62 4472.31,6524.93 v1@4472.31,6512.31 ; v1(4547.31,3619.76) C26.1@4597.31,3619.76 ; R36.2@4622.31,4849.35 v1(4622.31,4887.31) ; R37.2@4632.31,4684.35 v1(4632.31,4722.31) ; P1.25@4713.69,6661.88 4766.88,6661.88 v1(4767.31,6662.31) ; U10.4@5052.66,4643.73 v1(5107.31,4643.73) ; U10.2@5052.66,4820.9 v1(5107.31,4820.9) ; C27.1@5314.05,3708.85 v1(5367.31,3708.85)
  Top Layer w10: USB1.4@3104.3,3302.24 USB1.2@3267.68,3302.24 3290.32,3324.88 USB1.B1A12@3290.32,3346.34 ; USB1.3@3104.3,3642.39 USB1.1@3267.68,3642.39 3290.32,3619.76 USB1.A1B12@3290.32,3598.3 3298.99,3606.97 R9.1@3357.32,3606.97 3372.32,3606.97 3480.05,3714.72 3547.57,3714.72 3547.96,3715.11 3559.56,3715.11 U6.4@3574.16,3729.72 ; CARD1.10@3134.6,6305.9 v1(3134.59,6372.49) ; CARD1.9@3134.6,6628.73 v1(3200.93,6628.73) ; v1(3302.81,6460.52) 3311.76,6451.57 CARD1.6@3311.76,6404.32 ; pad.55@3357.12,4665 v1(3357.12,4642.46) 3357.12,4596.81 U2.40@3362.12,4591.81 ; v1(3362.12,3852.32) 3367.12,3847.32 C17.1@3389.64,3847.32 ; 3365.28,5647.31 v1(3365.28,5677.06) R24.1@3365.28,5707.31 ; R10.1@3411.97,3417.32 3432.32,3437.66 pad.55@3432.32,3462.32 v1(3432.32,3482.32) ; C33.1@3436.68,3302.32 v1(3492.32,3302.32) ; v1(3582.35,4104.54) 3610.94,4133.14 v1(3610.94,4158.84) 3610.94,4188.26 v1(3633.62,4188.26) 3666.06,4188.26 v1(3666.06,4159.83) 3666.06,4133.14 v1(3690.46,4133.14) 3721.18,4133.14 v1(3721.18,4161.55) v1(3721.18,4215.19) 3721.18,4243.38 v1(3687.76,4243.38) U2.41@3661.06,4243.38 v1(3633.62,4243.38) U2.41@3610.94,4243.38 ; U9.2@3610.62,5367.86 3612.32,5366.18 v1(3612.32,5311.15) pad.55@3612.32,5287.31 ; CARD1.11@3670.03,6305.9 v1(3670.03,6370.83) ; CARD1.12@3670.03,6628.73 v1(3732.32,6628.73) ; U1.T1@3741.09,5456.1 3741.09,5393.53 v1(3797.32,5337.31) ; U1.A1@3741.09,5928.53 3741.09,5936.1 v1(3757.32,5952.31) ; U1.T5@3867.07,5456.1 3890.02,5433.15 v1(3891.48,5433.15) ; U1.K6@3898.57,5645.07 3904.13,5639.52 3924.52,5639.52 U1.K7@3930.07,5645.07 U1.K8@3961.57,5645.07 3972.85,5656.36 v1(3972.85,5658.59) 3990.82,5676.56 U1.J9@3993.07,5676.56 ; U1.H8@3961.57,5708.06 U1.H9@3993.07,5708.06 3998.99,5708.06 v1(4009.55,5718.63) ; U1.G8@3961.57,5739.56 3975.43,5753.42 3975.43,5757.19 U1.F8@3961.57,5771.06 3971.57,5781.06 v1(3976.95,5781.06) 3983.07,5781.06 U1.F9@3993.07,5771.06 ; U1.K9@3993.07,5645.07 4007.97,5659.98 v1(4007.97,5660.5) ; U1.K10@4018.43,5646.17 4018.43,5650.05 v1(4007.97,5660.5) ; U1.J10@4024.55,5676.56 4024.03,5676.56 v1(4007.97,5660.5) ; U1.H10@4024.55,5708.06 4013.99,5718.63 v1(4009.55,5718.63) ; U1.G10@4024.55,5739.56 4009.55,5724.56 v1(4009.55,5718.63) ; v1(4057.32,3671.97) R12.1@4117.31,3671.97 ; U1.T12@4087.55,5456.1 4094.93,5456.1 4100.97,5450.05 4100.97,5448.61 4111.56,5438.02 4121.8,5438.02 v1(4124.68,5435.15) ; v1@4167.31,5822.31 4170.31,5822.31 U1.D15@4182.03,5834.05 ; U1.T16@4213.53,5456.1 v1(4227.31,5442.31) ; U1.H16@4213.53,5708.06 v1(4232.31,5708.14) ; U1.A16@4213.53,5928.53 v1(4232.31,5947.31) ; C23.1@4227.31,3609.88 v1(4288.5,3609.88) ; C22.1@4347.31,3609.88 4357.19,3619.76 v1(4401.29,3619.76) ; v1(4452.31,5862.31) 4470.73,5862.31 U5.54@4482.86,5874.44 ; v1(4522.07,3717.69) pad.55@4522.07,3735.92 U8.1@4522.07,3767.9 ; U5.52@4545.85,5874.44 v1(4545.85,5922.31) ; v1(4622.31,5377.31) 4640.35,5395.35 U5.6@4640.35,5425.19 ; v1(4722.31,5912.31) 4734.84,5899.8 U5.46@4734.84,5869.44 ; U7.4@4790.47,3669.91 4837.31,3623.07 v1(4837.31,3622.32) ; v1(4829.32,5367.31) U5.12@4829.32,5425.19 ; U5.41@4892.31,5874.44 v1(4892.31,5927.31) ; U5.28@5301.77,5869.44 5302.31,5869.99 v1(5302.31,5922.31) ; C27.1@5314.05,3708.85 pad.55@5314.05,3663.47 C28.1@5314.05,3613.85 v1(5339.39,3588.51) R14.1@5376.49,3588.51 v1(5376.49,3653.85)
  Bottom Layer w3.94: v1@3787.32,5627.31 C51.2@3809.64,5627.31 3809.64,5631.67 3819.64,5641.67 ; C61.2@3819.76,5722.31 3819.76,5662.44 C56.2@3819.64,5662.31 3819.64,5641.67 ; v1(3852.26,5817.37) 3864.64,5829.74 C37.2@3864.64,5837.31 ; C41.2@3907.32,5739.99 3914.32,5747.01 3914.32,5757.18 3929.77,5757.18 C62.2@3932.32,5754.64 3934.86,5757.18 v1(3950.82,5757.18) 3954.77,5757.18 3959.61,5752.34 3959.61,5749.99 3968.88,5740.72 3971.23,5740.72 C42.2@3974.64,5737.31 ; C54.2@3909.64,5632.31 3896.8,5645.15 3823.12,5645.15 3819.64,5641.67 ; C45.2@3927.32,5704.64 C45.2@3931.63,5704.64 ; C63.2@3927.32,5804.99 3947.32,5804.99 C50.2@3959.64,5817.31 ; v1(3945.26,5691) C45.2@3931.63,5704.64 ; v1(3972.85,5658.59) 3978.36,5658.59 3987.91,5649.04 ; v1(3976.95,5781.06) 3976.95,5800 3971.92,5805.03 3967.57,5805.03 3962.91,5809.69 3962.91,5814.04 C50.2@3959.64,5817.31 ; C53.2@3984.64,5607.31 3987.91,5610.59 3987.91,5638.38 3991.85,5642.31 C49.2@3994.64,5642.31 3987.91,5649.04 ; C39.2@4009.64,5832.31 3970.28,5832.31 3962.91,5824.94 3962.91,5820.59 C50.2@3959.64,5817.31 ; C43.2@4019.64,5777.31 4022.91,5780.59 4022.91,5784.94 4027.57,5789.6 4042.42,5789.6 4043.34,5788.68 v1(4071.8,5788.68) 4069.64,5786.51 C40.2@4069.64,5757.31 ; C47.2@4024.99,5692.31 4024.99,5677.53 4021.05,5673.58 ; v1(4052.32,5002.31) pad.55@4052.32,5027.32 ; C44.2@4059.64,5727.31 4059.64,5722.96 4074.06,5708.54 4098.13,5708.54 4109.99,5696.67 C55.2@4109.99,5692.31 ; v1(4072.32,5817.31) 4084.76,5829.76 C58.2@4084.76,5862.31 ; C48.2@4074.64,5577.31 4070.46,5581.49 4065.76,5581.49 4056.49,5590.76 4056.49,5638.81 C52.2@4062.32,5644.64 4065.59,5647.91 4069.94,5647.91 4109.99,5687.96 C55.2@4109.99,5692.31 ; v1@4132.31,5692.31 C55.2@4109.99,5692.31 ; C59.2@4137.31,5794.88 4141.74,5794.88 v1(4167.31,5820.45) ; C45.2@3931.63,5704.64 3967.32,5704.64 C46.2@3969.64,5702.31 3971.72,5700.23 3971.72,5680.59 C57.2@3974.99,5677.31 3978.73,5673.58 4021.05,5673.58 ; 3987.91,5649.04 3987.91,5654.61 3993.8,5660.5 v1(4007.97,5660.5) 4021.05,5673.58
  other v1: 5142.31,3877.32 5087.31,3977.32 4297.31,3997.32 4372.31,4052.32 4967.31,4102.31 4297.31,4127.31 4377.31,4192.31 4842.31,4222.31 4407.31,4327.31 4517.31,4332.31 4732.31,4337.31 4837.31,4357.31 4892.31,4417.31 4957.31,4442.31 4622.31,4447.31 5152.31,4502.31 4538.77,4527.31 5207.31,4642.31 4447.31,4697.31 5372.31,4727.31 4332.31,4812.31 5427.31,4867.31 4248.21,4893.21 5542.31,4947.31 4187.31,4957.31 5487.31,4982.31 4132.31,5012.31 5542.31,5107.31 5492.31,5147.31 4098.14,5222.31 5542.31,5242.31 5492.31,5267.31 4099.52,5322.31 4082.32,5372.31 5492.31,5402.31 4136.54,5503.17 3787.9,5627.9 3885.3,5629.77 3790.28,5660.79 3850.82,5691.81 4132.92,5692.31 5493.61,5707.31 3849.38,5755.27 3788.41,5785.61 3790.28,5881.26 5437.31,5942.31 5192.31,6187.31 5117.31,6262.31 5012.31,6362.31 4003.14,6372.31 4032.32,6492.31 4473,6512.31 4877.31,6522.31 4872.31,6602.31 4312.31,6632.31 4217.31,6672.31 4437.31,6692.31 4602.31,6722.31
HREF: P1.9 U1.A11 | length 1063.9
  Top Layer w3.94: U1.A11@4056.05,5928.53 4077.32,5949.8 v1(4077.32,5962.31) ; v1(4353.59,6532.31) P1.9@4353.59,6572.88
  Bottom Layer w3.94: v1(4077.32,5962.31) 4077.32,6172.31 4150.87,6245.87 4150.87,6249.81 4147.31,6253.37 4147.31,6257.31 4154.51,6264.51 4158.45,6264.51 4162.01,6260.95 4165.95,6260.95 4174.26,6269.26 4174.26,6273.2 4165.17,6282.29 4165.17,6286.23 4172.36,6293.43 4176.3,6293.43 4185.4,6284.33 4189.33,6284.33 4196.53,6291.53 4196.53,6295.47 4185.47,6306.53 4185.47,6310.47 4192.67,6317.67 4196.6,6317.67 4207.67,6306.6 4211.6,6306.6 4218.8,6313.8 4218.8,6317.74 4207.74,6328.8 4207.74,6332.74 4214.94,6339.94 4218.87,6339.94 4229.94,6328.87 4233.87,6328.87 4241.07,6336.07 4241.07,6340.01 4230.01,6351.07 4230.01,6355.01 4237.21,6362.21 4241.15,6362.21 4252.21,6351.15 4256.15,6351.15 4263.34,6358.34 4263.34,6362.28 4252.28,6373.34 4252.28,6377.28 4259.48,6384.48 4263.42,6384.48 4274.48,6373.42 4278.42,6373.42 4285.61,6380.61 4285.61,6384.55 4274.55,6395.61 4274.55,6399.55 4281.75,6406.75 4285.69,6406.75 4296.75,6395.69 4300.69,6395.69 4307.89,6402.89 4307.89,6406.82 4296.82,6417.89 4296.82,6421.82 4304.02,6429.02 4307.96,6429.02 4319.02,6417.96 4322.96,6417.96 4330.16,6425.16 4330.16,6429.09 4319.09,6440.16 4319.09,6444.09 4326.29,6451.29 4330.23,6451.29 4341.29,6440.23 4345.23,6440.23 4353.59,6448.59 v1(4353.59,6532.31)
INITN: pad.55@3747.32,4667.31 R5.1 U1.T9 U2.8 | length 1829.7
  Top Layer w10: U2.8@3712.12,3902.82 3709.36,3900.06 R5.1@3709.36,3842.32 3737.32,3842.32 v1(3747.32,3852.32) ; v1(3782.32,4702.31) 3927.32,4847.31 v1(3927.32,5267.31) ; U1.T9@3993.07,5456.1 4016.84,5432.31 v1(4017.32,5432.31)
  Bottom Layer w10: v1(3747.32,3852.32) pad.55@3747.32,4667.31 v1(3782.32,4702.31) ; v1(3927.32,5267.31) 4017.32,5357.31 v1(4017.32,5432.31)
M_CLK: CARD1.5 U1.C7 | length 946.6
  Top Layer w3.94: v1(3684.47,5851.2) 3685.17,5850.51 3915.04,5850.51 U1.C7@3930.07,5865.55
  Top Layer w10: CARD1.5@3355.07,6404.32 3357.32,6402.08 v1(3357.32,6187.31)
  Bottom Layer w10: v1(3357.32,6187.31) 3365.65,6187.31 3684.47,5868.49 v1(3684.47,5851.2)
M_CMD: CARD1.3 R20.1 U1.B4 | length 974.3
  Top Layer w10: v1(3441.69,6067.31) CARD1.3@3441.69,6404.32 ; R20.1@3571.97,5822.31 3571.97,5871.98 v1(3612.32,5912.31) ; v1(3822.32,5882.31) 3822.32,5883.77 U1.B4@3835.59,5897.03
  Bottom Layer w10: v1(3441.69,6067.31) 3461.69,6067.31 3665.61,5863.39 3665.61,5843.39 3676.66,5832.35 3692.28,5832.35 3700.13,5840.19 3780.19,5840.19 v1(3822.32,5882.31)
M_D0: CARD1.7 R18.1 U1.B2 | length 858.2
  Top Layer w10: v1(3268.46,6312.31) CARD1.7@3268.46,6404.32 ; R18.1@3571.97,5942.31 3577.32,5947.65 v1(3577.32,6002.31) ; v1(3757.32,5882.31) 3757.88,5882.31 U1.B2@3772.59,5897.03
  Bottom Layer w10: v1(3268.46,6312.31) 3717.32,5863.46 3735.13,5863.46 3753.98,5882.31 v1(3757.32,5882.31)
M_D1: CARD1.8 R19.1 U1.B1 | length 1003.9
  Top Layer w10: CARD1.8@3225.15,6404.32 3227.32,6402.16 v1(3227.32,6352.31) ; R19.1@3571.97,6047.31 3596.97,6047.31 3723.02,5921.27 3723.02,5921.05 3733.61,5910.46 3733.83,5910.46 3739.82,5904.48 U1.B1@3739.82,5895.76 ; v1(3727.32,5882.31) 3727.32,5883.26 U1.B1@3739.82,5895.76 ; U1.B1@3741.09,5897.03 U1.B1@3739.82,5895.76
  Bottom Layer w10: v1(3227.32,6352.31) 3257.32,6352.31 v1(3727.32,5882.31)
M_D2: CARD1.1 R16.1 U1.B6 | length 1267.9
  Top Layer w3.94: v1(3542.32,5897.31) 3548.15,5891.48 3548.15,5623.96 R16.1@3571.82,5600.29
  Top Layer w10: CARD1.1@3528.3,6404.32 3539.51,6393.11 3539.51,5900.12 v1(3542.32,5897.31) ; v1(3882.32,5882.31) 3883.86,5882.31 U1.B6@3898.57,5897.03
  Bottom Layer w10: v1(3542.32,5897.31) 3552.32,5897.31 3588.46,5861.17 3588.46,5859.5 3599.5,5848.46 3615.13,5848.46 3615.67,5849 3620.59,5849 3645.65,5823.94 3645.65,5804.47 3804.47,5804.47 v1(3882.32,5882.31)
M_D3: CARD1.2 R17.1 U1.B5 | length 1083.1
  Top Layer w10: v1(3482.32,5992.31) 3482.32,6401.65 CARD1.2@3484.99,6404.32 ; R17.1@3571.97,5707.31 3598.83,5734.17 3598.83,5858.83 v1(3607.32,5867.31) ; v1@3852.36,5882.31 U1.B5@3867.07,5897.03
  Bottom Layer w10: v1(3482.32,5992.31) v1(3607.32,5867.31) 3621.98,5867.31 3670.89,5818.41 3798.7,5818.41 3852.32,5872.02 v1(3852.32,5882.31)
MCLK: P1.13 U1.A12 | length 1068.8
  Top Layer w3.94: U1.A12@4087.55,5928.53 4107.31,5948.3 v1(4107.31,5977.31) ; v1(4432.33,6512.31) P1.13@4432.33,6572.88
  Bottom Layer w3.94: v1(4107.31,5977.31) 4107.31,6082.31 4254.76,6229.76 4254.76,6233.69 4245.66,6242.79 4245.66,6246.73 4252.86,6253.92 4256.8,6253.92 4265.89,6244.83 4269.83,6244.83 4277.03,6252.03 4277.03,6255.96 4265.96,6267.03 4265.96,6270.96 4273.16,6278.16 4277.1,6278.16 4288.16,6267.1 4292.1,6267.1 4299.3,6274.3 4299.3,6278.24 4288.24,6289.3 4288.24,6293.24 4295.43,6300.43 4299.37,6300.43 4310.43,6289.37 4314.37,6289.37 4321.57,6296.57 4321.57,6300.51 4310.51,6311.57 4310.51,6315.51 4317.71,6322.71 4321.64,6322.71 4332.71,6311.64 4336.64,6311.64 4343.84,6318.84 4343.84,6322.78 4332.78,6333.84 4332.78,6337.78 4339.98,6344.98 4343.91,6344.98 4354.98,6333.91 4358.91,6333.91 4366.11,6341.11 4366.11,6345.05 4355.05,6356.11 4355.05,6360.05 4362.25,6367.25 4366.18,6367.25 4377.25,6356.18 4381.18,6356.18 4388.38,6363.38 4388.38,6367.32 4377.32,6378.38 4377.32,6382.32 4384.52,6389.52 4388.46,6389.52 4399.52,6378.46 4403.46,6378.46 4410.65,6385.65 4410.65,6389.59 4399.59,6400.65 4399.59,6404.59 4406.79,6411.79 4410.73,6411.79 4421.79,6400.73 4425.73,6400.73 4432.33,6407.33 v1(4432.33,6512.31)
PCLK: P1.17 U1.C8 | length 1063.8
  Top Layer w3.94: U1.C8@3961.57,5865.55 3976.6,5850.51 4093.78,5850.51 4102.59,5859.32 4102.59,5871.77 4112.82,5882 4125.27,5882 4134.08,5890.81 4134.08,5903.26 4134.8,5903.98 v1(4134.8,5914.66) ; P1.17@4511.06,6572.9 4512.31,6571.64 v1(4512.31,6512.31)
  Bottom Layer w3.94: v1(4134.8,5914.66) 4148.14,5928.01 4148.14,5998.14 4486.31,6336.31 4486.31,6340.25 4480.25,6346.31 4480.25,6350.25 4487.45,6357.45 4491.39,6357.45 4497.45,6351.39 4501.39,6351.39 4512.31,6362.31 v1(4512.31,6512.31)
PROGRAM: R37.1 U2.27 U10.3 | length 743.5
  Top Layer w3.94: U2.27@4007.12,4591.81 4166.81,4591.81 v1(4167.31,4592.31) ; v1(4582.31,4652.31) 4584.35,4650.27 R37.1@4632.31,4650.27 4715.42,4650.27 U10.3@4721.97,4643.73
  Bottom Layer w3.94: v1(4167.31,4592.31) 4227.31,4652.31 v1(4582.31,4652.31)